# Altium PCB cs301_Team01_Artwork.PcbDoc (part 2 of 2)
Units mm, origin at the board's own origin, x right, y up, seen from the top; angles counter-clockwise.
Board outline 87.88 x 127 mm, 2 copper layers (Top Layer, Bottom Layer); 173 components, 113 nets, 459 pads, 113 vias.
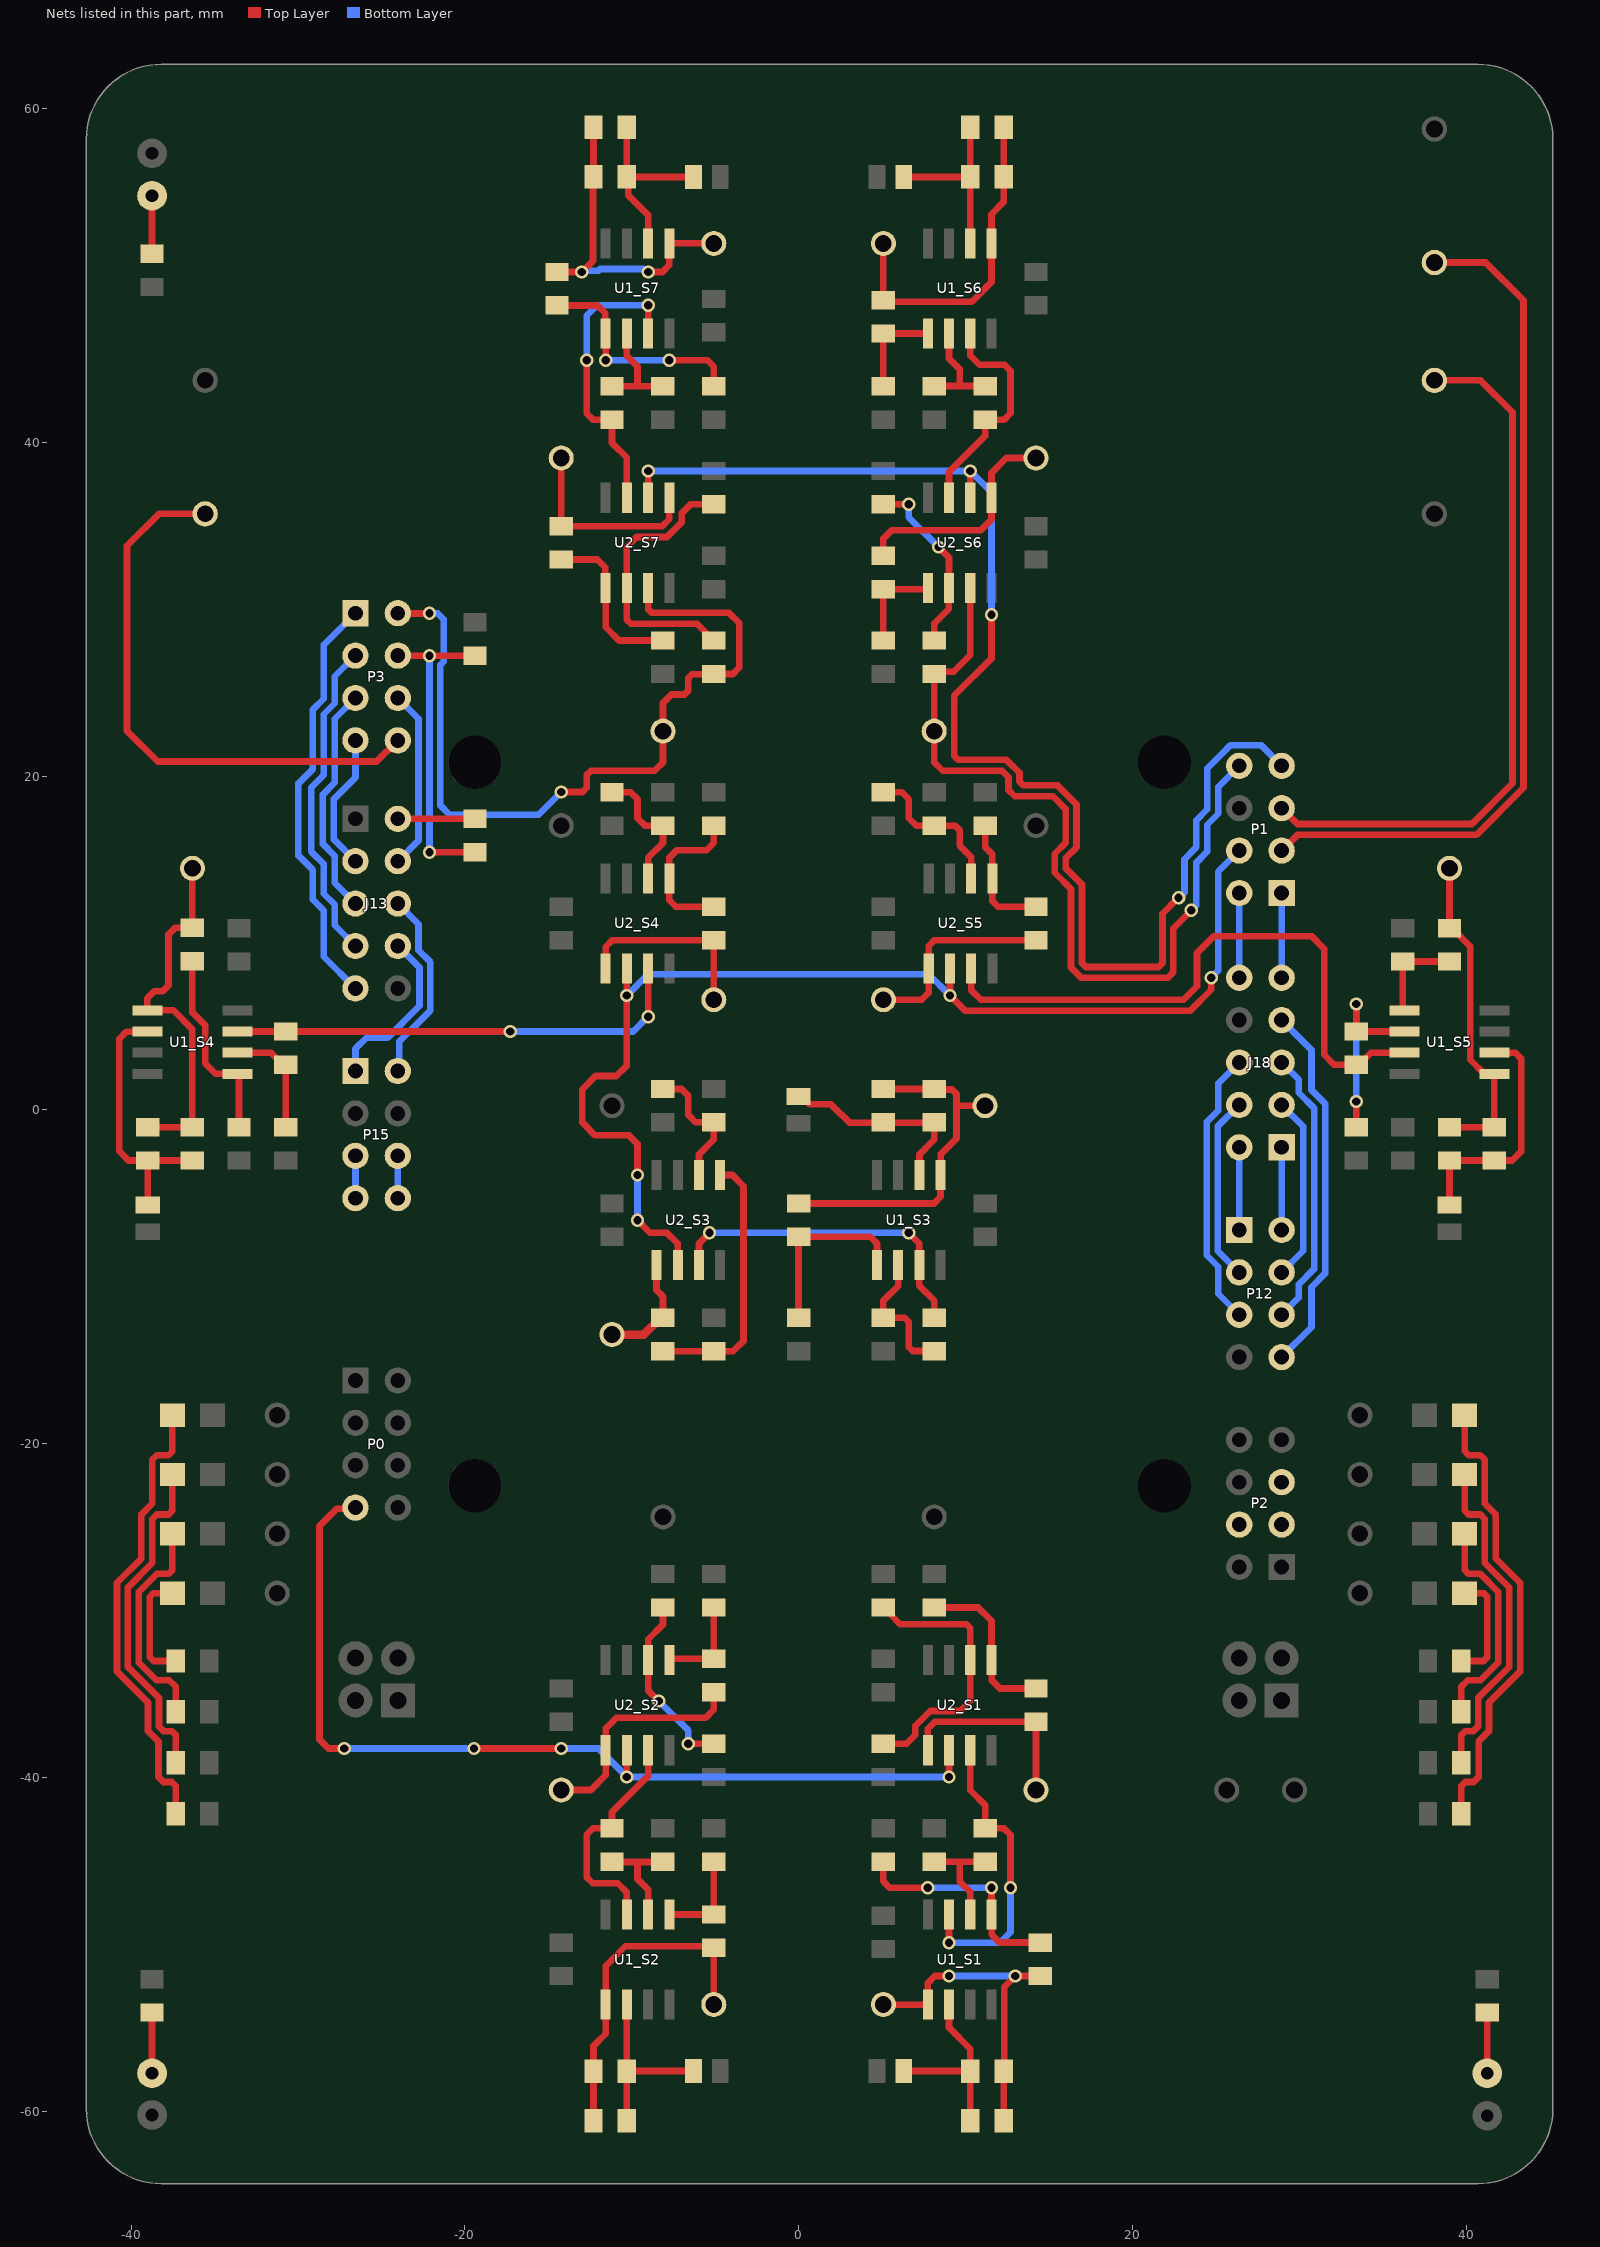
[diagram p2: the nets of this part, all layers, seen from the top]

## Via types
v1: diameter 0.8, hole 0.5, Top Layer to Bottom Layer, 111 vias
v2: diameter 1, hole 0.5, Top Layer to Bottom Layer, 2 vias

## Nets (pads, with @x,y where several pads share a name; then routed paths per layer and width w, separated by ;. In a path a pad name is that pad's centre, name@x,y a point inside that pad or via, vN(x,y) a via of type N, cw(c..) or ccw(c..) an arc to the next point about the centre after c; other vN are vias at no path point) (continued)
Is_White6: P1.8 R8_S6.1 U2_S6.7 Vo_S6.1 | length 52.1
  Top Layer w0.4: U2_S6.7@10.287,31.282 10.287,27.251 9.292,26.256 8.26,26.256 R8_S6.1@8.128,26.124 Vo_S6.1@8.128,22.696 8.128,20.828 8.636,20.32 12.192,20.32 12.581,19.931 12.581,19.169 12.954,18.796 15.24,18.796 16.002,18.034 16.002,16.002 15.348,15.348 15.348,14.215 16.325,13.238 16.325,8.529 16.943,7.912 22.118,7.912 22.46,8.254 22.46,10.886 v1(23.531,11.957)
  Bottom Layer w0.4: v1(23.531,11.957) 23.838,12.264 23.838,14.821 24.492,15.475 24.492,17.09 25.146,17.744 25.146,19.359 P1.8@26.406,20.619
Is_White7: P3.2 R8_S7.1 U2_S7.7 Vo_S7.1 | length 48.7
  Top Layer w0.4: P3.2@-24.013,29.763 -23.99,29.74 -22.14,29.74 -22.118,29.718 v1@-22.098,29.718 ; v1(-14.224,19.05) -12.954,19.05 -12.7,19.304 -12.7,20.066 -12.446,20.32 -8.636,20.32 -8.128,20.828 Vo_S7.1@-8.128,22.696 -8.128,24.384 -7.62,24.892 -6.838,24.892 -6.604,25.126 -6.604,25.878 -6.37,26.112 R8_S7.1@-5.092,26.112 ; U2_S7.7@-9.017,31.282 -9.017,30.016 -8.783,29.782 -4.161,29.782 -3.556,29.177 -3.556,26.506 -3.938,26.124 R8_S7.1@-5.08,26.124
  Bottom Layer w0.4: v1(-22.118,29.763) -21.635,29.763 -21.264,29.392 -21.264,26.869 -21.464,26.67 -21.464,18.232 -20.92,17.688 -15.586,17.688 v1(-14.224,19.05)
M1_D1: J13.3 P3.7 | length 8.7
  Bottom Layer w0.4: P3.7@-26.553,22.143 -26.553,19.929 -27.848,18.634 -27.848,16.199 J13.3@-26.553,14.904 -26.471,14.986 J13.3@-26.162,14.986
M1_D2: J13.9 P3.1 | length 25.3
  Bottom Layer w0.4: J13.9@-26.553,7.284 -28.448,9.179 -28.448,11.938 -29.102,12.592 -29.102,14.37 -29.972,15.24 -29.972,19.558 -29.102,20.428 -29.102,23.983 -28.448,24.637 -28.448,27.868 -26.922,29.394 P3.1@-26.553,29.763
M1_EN: J13.8 P15.1 | length 10.4
  Bottom Layer w0.4: P15.1@-26.553,2.331 -26.553,3.673 -25.908,4.318 -24.638,4.318 -22.718,6.238 -22.718,8.529 J13.8@-24.013,9.824
M1_IN1: J13.5 P3.5 | length 13.9
  Bottom Layer w0.4: J13.5@-26.553,12.364 -27.794,13.605 -27.794,15.22 -28.502,15.929 -28.502,18.904 -27.794,19.613 -27.794,23.442 P3.5@-26.553,24.683
M1_IN2: J13.4 P3.6 | length 10.8
  Bottom Layer w0.4: J13.4@-24.013,14.904 -22.772,16.145 -22.772,23.442 P3.6@-24.013,24.683
M1_INV: J13.7 P3.3 | length 19.6
  Bottom Layer w0.4: J13.7@-26.553,9.824 -27.794,11.065 -27.794,12.3 -28.448,12.954 -28.448,14.732 -29.21,15.494 -29.21,19.304 -28.448,20.066 -28.448,23.713 -27.794,24.366 -27.794,25.982 P3.3@-26.553,27.223
M1_QA: P15.5 P15.7 | length 2.5
  Bottom Layer w0.4: P15.7@-26.553,-5.289 P15.5@-26.553,-2.749
M1_QB: P15.6 P15.8 | length 2.5
  Bottom Layer w0.4: P15.8@-24.013,-5.289 P15.6@-24.013,-2.749
M1_SLW: J13.6 P15.2 | length 11.6
  Bottom Layer w0.4: P15.2@-24.013,2.331 -23.926,2.418 -23.926,4.105 -22.064,5.968 -22.064,8.856 -22.772,9.564 -22.772,11.123 J13.6@-24.013,12.364
M2_D1: J18.1 P12.2 | length 5
  Bottom Layer w0.4: P12.2@28.946,-7.194 J18.1@28.946,-2.241
M2_D2: J18.7 P12.8 | length 22.3
  Bottom Layer w0.4: P12.8@28.946,-14.814 30.734,-13.026 30.734,-10.626 31.549,-9.811 31.549,0.376 30.734,1.191 30.734,3.591 J18.7@28.946,5.379
M2_EN: J18.6 P12.5 | length 16.7
  Bottom Layer w0.4: P12.5@26.406,-12.274 25.146,-11.014 25.146,-9.399 24.457,-8.709 24.457,-0.726 25.146,-0.036 25.146,1.579 J18.6@26.406,2.839
M2_IN1: J18.3 P12.4 | length 11.1
  Bottom Layer w0.4: P12.4@28.946,-9.734 30.241,-8.439 30.241,-0.996 J18.3@28.946,0.299
M2_IN2: J18.2 P12.1 | length 5
  Bottom Layer w0.4: P12.1@26.406,-7.194 J18.2@26.406,-2.241
M2_INV: J18.5 P12.6 | length 16.7
  Bottom Layer w0.4: P12.6@28.946,-12.274 29.972,-11.248 29.972,-10.464 30.895,-9.54 30.895,0.105 29.972,1.029 29.972,1.813 J18.5@28.946,2.839
M2_QA: J18.9 P1.1 | length 5.1
  Bottom Layer w0.4: J18.9@28.946,7.919 P1.1@28.946,12.999
M2_QB: J18.10 P1.2 | length 5.1
  Bottom Layer w0.4: J18.10@26.406,7.919 P1.2@26.406,12.999
M2_SLW: J18.4 P12.3 | length 11.1
  Bottom Layer w0.4: P12.3@26.406,-9.734 25.111,-8.439 25.111,-0.996 J18.4@26.406,0.299
NetC1_S1_1: C1_S1.1 D4_S1.C R9_S1.1 U1_S1.2 | length 11.5
  Top Layer w0.4: D4_S1.C@6.3,-57.594 C1_S1.1@10.287,-57.594 ; U1_S1.2@9.017,-53.61 9.017,-54.991 10.287,-56.261 C1_S1.1@10.287,-57.594 ; R9_S1.1@10.287,-60.562 C1_S1.1@10.287,-57.594
NetC1_S2_1: C1_S2.1 D4_S2.C R9_S2.1 U1_S2.2 | length 10.7
  Top Layer w0.4: R9_S2.1@-10.287,-60.308 -10.287,-57.514 U1_S2.2@-10.287,-53.61 ; C1_S2.1@-10.287,-57.594 D4_S2.C@-6.3,-57.594
NetC1_S3_1: C1_S3.1 D4_S3.C R9_S3.1 U1_S3.2 | length 12.3
  Top Layer w0.4: D4_S3.C@0,0.8 0.225,0.8 0.692,0.333 1.953,0.333 3.048,-0.762 5.08,-0.762 R9_S3.1@8.128,-0.762 ; U1_S3.2@7.239,-3.904 7.245,-3.898 7.245,-2.661 8.128,-1.778 R9_S3.1@8.128,-0.762 ; R9_S3.1@8.128,-0.746 R9_S3.1@8.128,-0.762
NetC1_S4_1: C1_S4.1 D4_S4.C R9_S4.1 U1_S4.2 | length 15.9
  Top Layer w0.4: U1_S4.2@-39.022,4.699 -39.028,4.693 -40.265,4.693 -40.709,4.249 -40.709,-2.471 -40.148,-3.032 C1_S4.1@-39,-3.032 ; D4_S4.C@-39,-5.7 C1_S4.1@-39,-3.032 ; R9_S4.1@-36.322,-3.032 C1_S4.1@-39,-3.032
NetC1_S5_1: C1_S5.1 D4_S5.C R9_S5.1 U1_S5.2 | length 14.5
  Top Layer w0.4: D4_S5.C@39,-5.7 R9_S5.1@39,-3.032 C1_S5.1@41.678,-3.032 42.762,-3.032 43.295,-2.499 43.295,3.084 42.95,3.429 U1_S5.2@41.7,3.429
NetC1_S6_1: C1_S6.1 D4_S6.C R9_S6.1 U1_S6.2 | length 10.7
  Top Layer w0.4: D4_S6.C@6.3,55.906 C1_S6.1@10.287,55.906 ; U1_S6.2@10.287,51.922 10.287,55.826 R9_S6.1@10.287,58.62
NetC1_S7_1: C1_S7.1 D4_S7.C R9_S7.1 U1_S7.2 | length 11.5
  Top Layer w0.4: R9_S7.1@-10.287,58.874 C1_S7.1@-10.287,55.906 ; U1_S7.2@-9.017,51.922 -9.017,53.622 -10.211,54.815 -10.211,55.83 C1_S7.1@-10.287,55.906 ; D4_S7.C@-6.3,55.906 C1_S7.1@-10.287,55.906
NetC2_S1_2: C2_S1.2 R7_S1.1 U2_S1.5 | length 10.1
  Top Layer w0.4: C2_S1.2@8.128,-29.812 10.762,-29.812 11.557,-30.607 U2_S1.5@11.557,-32.86 ; U2_S1.5@11.557,-32.97 11.585,-32.998 11.585,-34.191 12.064,-34.67 R7_S1.1@14.224,-34.67
NetC2_S2_2: C2_S2.2 R7_S2.1 U2_S2.5 | length 5.8
  Top Layer w0.4: U2_S2.5@-7.747,-32.97 -7.747,-32.938 -7.701,-32.892 R7_S2.1@-5.08,-32.892 C2_S2.2@-5.08,-29.812
NetC2_S3_2: C2_S3.2 R7_S3.1 U2_S3.5 | length 16
  Top Layer w0.4: R7_S3.1@-8.128,-14.462 -3.92,-14.462 -3.302,-13.844 -3.302,-4.572 -3.97,-3.904 U2_S3.5@-4.699,-3.904
NetC2_S4_2: C2_S4.2 R7_S4.1 U2_S4.5 | length 9.4
  Top Layer w0.4: R7_S4.1@-5.08,12.176 -7.35,12.176 -7.747,12.573 U2_S4.5@-7.747,13.876 -7.741,13.882 -7.741,15.119 -7.309,15.551 -5.531,15.551 -5.08,16.002 C2_S4.2@-5.08,17.034
NetC2_S5_2: C2_S5.2 R7_S5.1 U2_S5.5 | length 7.5
  Top Layer w0.4: C2_S5.2@11.176,17.034 11.176,15.748 11.61,15.314 U2_S5.5@11.61,13.876 11.61,12.52 11.954,12.176 R7_S5.1@14.224,12.176
NetC2_S6_2: C2_S6.2 R7_S6.1 U2_S6.5 | length 5.8
  Top Layer w0.4: C2_S6.2@5.08,28.124 R7_S6.1@5.08,31.204 7.701,31.204 7.747,31.25 U2_S6.5@7.747,31.282
NetC2_S7_2: C2_S7.2 R7_S7.1 U2_S7.5 | length 10.1
  Top Layer w0.4: R7_S7.1@-14.224,32.982 -12.064,32.982 -11.585,32.503 -11.585,31.31 U2_S7.5@-11.557,31.282 ; U2_S7.5@-11.557,31.172 -11.557,28.919 -10.762,28.124 C2_S7.2@-8.128,28.124
NetD1_A: D1.A R1.1 | length 3.5
  Top Layer w0.4: R1.1@-38.74,51.308 D1.A@-38.74,54.776
NetD2_A: D2.A R2.1 | length 3.6
  Top Layer w0.4: D2.A@-38.74,-57.724 R2.1@-38.74,-54.086
NetD3_A: D3.A R3.1 | length 3.6
  Top Layer w0.4: D3.A@41.26,-57.724 R3.1@41.26,-54.086
NetD5_2: D5.2 R12.2 | length 27.4
  Top Layer w0.4: D5.2@-37.522,-18.288 -37.522,-20.456 -37.756,-20.69 -38.46,-20.69 -38.726,-20.956 -38.726,-23.587 -39.38,-24.241 -39.38,-26.872 -40.844,-28.336 -40.844,-33.65 -38.98,-35.514 -38.98,-37.227 -38.354,-37.853 -38.354,-39.976 -38.06,-40.27 -37.556,-40.27 -37.322,-40.504 R12.2@-37.322,-42.164
NetD6_2: D6.2 R13.2 | length 20.3
  Top Layer w0.4: D6.2@-37.522,-21.844 -37.522,-24.012 -37.756,-24.246 -38.46,-24.246 -38.726,-24.512 -38.726,-27.143 -40.19,-28.607 -40.19,-33.379 -38.326,-35.243 -38.326,-36.956 -38.06,-37.222 -37.556,-37.222 -37.322,-37.456 R13.2@-37.322,-39.116
NetD7_2: D7.2 R14.2 | length 13.3
  Top Layer w0.4: D7.2@-37.522,-25.4 -37.522,-27.568 -37.756,-27.802 -38.46,-27.802 -39.536,-28.878 -39.536,-33.108 -38.47,-34.174 -37.708,-34.174 -37.322,-34.56 R14.2@-37.322,-36.068
NetD8_2: D8.2 R15.2 | length 6.7
  Top Layer w0.4: D8.2@-37.522,-28.956 -38.647,-28.956 -38.882,-29.19 -38.882,-32.786 -38.647,-33.02 R15.2@-37.322,-33.02
NetD9_2: D9.2 R16.2 | length 27.4
  Top Layer w0.4: R16.2@39.715,-42.164 39.715,-40.504 39.949,-40.27 40.453,-40.27 40.747,-39.976 40.747,-37.853 41.373,-37.227 41.373,-35.514 43.237,-33.65 43.237,-28.336 41.773,-26.872 41.773,-24.241 41.119,-23.587 41.119,-20.956 40.853,-20.69 40.149,-20.69 39.915,-20.456 D9.2@39.915,-18.288
NetD10_2: D10.2 R17.2 | length 20.3
  Top Layer w0.4: R17.2@39.715,-39.116 39.715,-37.456 39.949,-37.222 40.453,-37.222 40.719,-36.956 40.719,-35.243 42.583,-33.379 42.583,-28.607 41.119,-27.143 41.119,-24.512 40.853,-24.246 40.149,-24.246 39.915,-24.012 D10.2@39.915,-21.844
NetD11_2: D11.2 R18.2 | length 13.3
  Top Layer w0.4: R18.2@39.715,-36.068 39.715,-34.56 40.101,-34.174 40.863,-34.174 41.929,-33.108 41.929,-28.878 40.853,-27.802 40.149,-27.802 39.915,-27.568 D11.2@39.915,-25.4
NetD12_2: D12.2 R19.2 | length 6.7
  Top Layer w0.4: R19.2@39.715,-33.02 41.04,-33.02 41.275,-32.786 41.275,-29.19 41.04,-28.956 D12.2@39.915,-28.956
NetR4_S1_1: R4_S1.1 R10_S1.2 U1_S1.6 | length 6.1
  Top Layer w0.4: R10_S1.2@8.128,-45.052 9.652,-45.052 ; U1_S1.6@10.287,-47.846 10.287,-46.863 9.652,-46.228 9.652,-45.052 ; R4_S1.1@11.176,-45.052 9.652,-45.052
NetR4_S2_1: R4_S2.1 R10_S2.2 U1_S2.6 | length 6.4
  Top Layer w0.4: R4_S2.1@-11.16,-45.068 -9.652,-45.068 ; U1_S2.6@-9.017,-48.21 -9.017,-46.719 -9.652,-46.084 -9.652,-45.068 ; R10_S2.2@-8.144,-45.068 -9.652,-45.068
NetR4_S3_1: R4_S3.1 R10_S3.2 U1_S3.6 | length 8.4
  Top Layer w0.4: U1_S3.6@5.969,-9.224 5.969,-10.541 5.08,-11.43 5.08,-12.446 5.096,-12.462 6.366,-12.462 6.604,-12.7 6.604,-14.21 6.838,-14.444 8.11,-14.444 R4_S3.1@8.128,-14.462
NetR4_S4_1: R4_S4.1 R10_S4.2 U1_S4.6 | length 6.9
  Top Layer w0.4: U1_S4.6@-33.622,3.429 -31.614,3.429 -30.884,2.699 R4_S4.1@-30.734,2.699 R10_S4.2@-30.734,-1.032
NetR4_S5_1: R4_S5.1 R10_S5.2 U1_S5.6 | length 12
  Top Layer w0.4: v1@33.274,0.508 33.274,0.4 33.412,0.262 R10_S5.2@33.412,-1.032 ; v1@33.528,6.35 33.528,6.242 33.412,6.126 R4_S5.1@33.412,4.699 U1_S5.6@36.3,4.699
  Bottom Layer w0.4: v1(33.412,0.508) v1(33.412,6.35)
NetR4_S6_1: R4_S6.1 R10_S6.2 U1_S6.6 | length 6.4
  Top Layer w0.4: R10_S6.2@8.144,43.38 9.652,43.38 ; U1_S6.6@9.017,46.522 9.017,45.031 9.652,44.396 9.652,43.38 ; R4_S6.1@11.16,43.38 9.652,43.38
NetR4_S7_1: R4_S7.1 R10_S7.2 U1_S7.6 | length 6.1
  Top Layer w0.4: R4_S7.1@-11.176,43.364 -9.652,43.364 ; U1_S7.6@-10.287,46.158 -10.287,45.175 -9.652,44.54 -9.652,43.364 ; R10_S7.2@-8.128,43.364 -9.652,43.364
NetR6_S1_1: R6_S1.1 R8_S1.2 U2_S1.6 | length 16.8
  Top Layer w0.4: R6_S1.1@5.08,-37.972 6.478,-37.972 6.993,-37.457 6.993,-36.913 7.89,-36.016 9.704,-36.016 10.287,-35.433 10.287,-32.86 10.287,-31.05 10.053,-30.816 6.084,-30.816 5.58,-30.312 5.58,-30.162 5.23,-29.812 R8_S1.2@5.08,-29.812
NetR6_S2_1: R6_S2.1 R8_S2.2 U2_S2.6 | length 11
  Top Layer w0.4: v1(-8.382,-35.416) -9.017,-34.781 U2_S2.6@-9.017,-32.97 -9.005,-32.958 -9.005,-31.721 -8.128,-30.844 R8_S2.2@-8.128,-29.812 ; v1(-6.604,-37.972) R6_S2.1@-5.08,-37.972
  Bottom Layer w0.4: v1(-8.382,-35.416) -6.604,-37.194 v1@-6.604,-37.956
NetR6_S3_1: R6_S3.1 R8_S3.2 U2_S3.6 | length 8.1
  Top Layer w0.4: R8_S3.2@-8.128,1.254 -7.018,1.254 -6.604,0.84 -6.604,-0.302 -6.16,-0.746 R6_S3.1@-5.08,-0.746 ; U2_S3.6@-5.969,-3.904 -5.963,-3.898 -5.963,-2.661 -5.08,-1.778 R6_S3.1@-5.08,-0.762
NetR6_S4_1: R6_S4.1 R8_S4.2 U2_S4.6 | length 8.1
  Top Layer w0.4: R8_S4.2@-11.176,19.034 -10.066,19.034 -9.652,18.62 -9.652,17.478 -9.208,17.034 R6_S4.1@-8.128,17.034 -8.128,16.002 -9.011,15.119 -9.011,13.882 U2_S4.6@-9.017,13.876
NetR6_S5_1: R6_S5.1 R8_S5.2 U2_S5.6 | length 9.4
  Top Layer w0.4: R8_S5.2@5.08,19.034 6.19,19.034 6.604,18.62 6.604,17.478 7.048,17.034 R6_S5.1@8.128,17.034 9.382,17.034 9.652,16.764 9.652,15.851 10.34,15.163 U2_S5.6@10.34,13.876
NetR6_S6_1: R6_S6.1 R8_S6.2 U2_S6.6 | length 11
  Top Layer w0.4: R6_S6.1@5.08,36.284 v1(6.604,36.284) ; R8_S6.2@8.128,28.124 8.128,29.156 9.005,30.033 9.005,31.27 U2_S6.6@9.017,31.282 9.017,33.093 v1(8.382,33.728)
  Bottom Layer w0.4: v1@6.604,36.268 6.604,35.506 v1(8.382,33.728)
NetR6_S7_1: R6_S7.1 R8_S7.2 U2_S7.6 | length 16.8
  Top Layer w0.4: R8_S7.2@-5.08,28.124 -5.23,28.124 -5.58,28.474 -5.58,28.624 -6.084,29.128 -10.053,29.128 -10.287,29.362 -10.287,31.172 -10.287,33.745 -9.704,34.328 -7.89,34.328 -6.993,35.225 -6.993,35.769 -6.478,36.284 R6_S7.1@-5.08,36.284
Rx_1: P2.3
Rx_2: P2.5
Tx_1: P2.4
V_Amp_S1: R4_S1.2 U1_S1.7 U2_S1.3 | length 18.1
  Top Layer w0.4: v1(9.017,-49.911) U1_S1.7@9.017,-48.354 ; U2_S1.3@10.287,-38.514 10.287,-40.767 11.176,-41.656 R4_S1.2@11.176,-43.052 12.318,-43.052 12.7,-43.434 v1(12.7,-46.606) v1@12.7,-46.736
  Bottom Layer w0.4: v1(9.017,-49.911) 12.065,-49.911 12.7,-49.276 v1(12.7,-46.606)
V_Amp_S2: R4_S2.2 U1_S2.7 U2_S2.3 | length 13.9
  Top Layer w0.4: U1_S2.7@-10.287,-48.21 -10.287,-46.89 -10.839,-46.338 -12.336,-46.338 -12.7,-45.974 -12.7,-43.434 -12.302,-43.036 -11.192,-43.036 R4_S2.2@-11.176,-43.052 -11.176,-42.076 -9.017,-39.917 U2_S2.3@-9.017,-38.37
V_Amp_S3: R4_S3.2 U1_S3.7 U2_S3.3 | length 20
  Top Layer w0.4: U2_S3.3@-5.894,-9.229 U2_S3.3@-5.969,-9.304 -5.969,-8.001 v1(-5.334,-7.366) ; v1(6.604,-7.366) 7.226,-7.988 7.226,-9.211 7.239,-9.224 U1_S3.7@7.239,-9.304 7.239,-10.541 8.128,-11.43 R4_S3.2@8.128,-12.462
  Bottom Layer w0.4: v1(-5.334,-7.366) v1(6.604,-7.366)
V_Amp_S4: R4_S4.2 U1_S4.7 U2_S4.3 | length 28
  Top Layer w0.4: U1_S4.7@-33.622,4.699 R4_S4.2@-30.734,4.699 v1(-17.272,4.699) ; v1@-9.144,5.588 v1@-9.017,5.715 ; v1(-9.017,5.588) v1@-9.017,5.715 ; U2_S4.3@-9.017,8.476 v1@-9.017,5.715
  Bottom Layer w0.4: v1(-17.272,4.699) -9.906,4.699 v1(-9.017,5.588)
V_Amp_S5: R4_S5.2 U1_S5.7 U2_S5.3 | length 37.4
  Top Layer w0.4: U2_S5.3@10.34,8.476 10.34,7.186 10.922,6.604 23.067,6.604 23.876,7.413 23.876,9.398 24.892,10.414 30.734,10.414 31.496,9.652 31.496,3.302 32.099,2.699 R4_S5.2@33.412,2.699 33.562,2.699 34.292,3.429 U1_S5.7@36.3,3.429
V_Amp_S6: R4_S6.2 U1_S6.7 U2_S6.3 | length 13.9
  Top Layer w0.4: U2_S6.3@9.017,36.682 9.017,38.222 11.176,40.381 R4_S6.2@11.176,41.364 11.192,41.348 12.302,41.348 12.7,41.746 12.7,44.286 12.336,44.65 10.839,44.65 10.287,45.202 U1_S6.7@10.287,46.522
V_Amp_S7: R4_S7.2 U1_S7.7 U2_S7.3 | length 18
  Top Layer w0.4: v1@-12.7,44.958 v1(-12.7,44.918) -12.7,41.746 -12.318,41.364 R4_S7.2@-11.176,41.364 -11.176,39.968 -10.287,39.079 U2_S7.3@-10.287,36.826 ; U1_S7.7@-9.017,46.666 v1(-9.017,48.223)
  Bottom Layer w0.4: v1(-12.7,44.918) -12.7,47.588 -12.065,48.223 v1(-9.017,48.223)
V_Bat: J13.2 R4.2 | length 4.6
  Top Layer w0.4: J13.2@-24.013,17.444 R4.2@-19.39,17.444
V_Battery: P3.4 R4.1 R5.2 | length 19.1
  Top Layer w0.4: P3.4@-24.013,27.223 v1(-22.118,27.223) R5.2@-19.39,27.223 ; v1(-22.118,15.444) R4.1@-19.39,15.444
  Bottom Layer w0.4: v1(-22.118,15.444) v1(-22.118,27.223)
V_Bias1: P0.7 U2_S1.2 U2_S2.2 | length 57.3
  Top Layer w0.4: v1(-27.221,-38.262) -28.166,-38.262 -28.71,-37.718 -28.71,-24.943 -27.657,-23.889 -26.611,-23.889 P0.7@-26.553,-23.831 ; v1(-19.448,-38.262) v1(-14.224,-38.262) ; v1(-10.287,-39.972) U2_S2.2@-10.287,-38.37 ; v1(9.017,-39.972) U2_S1.2@9.017,-38.37
  Bottom Layer w0.4: v1(-27.221,-38.262) v1(-19.448,-38.262) ; v1(-14.224,-38.262) -11.997,-38.262 v1(-10.287,-39.972) v1(9.017,-39.972)
V_Bias3: P1.4 U2_S3.2 U2_S4.2 U2_S5.2 | length 71.4
  Top Layer w0.4: U2_S4.2@-10.287,8.476 v1(-10.287,6.858) -10.287,2.667 -10.922,2.032 -12.162,2.032 -12.954,1.24 -12.954,-0.762 -12.192,-1.524 -10.16,-1.524 -9.652,-2.032 v1(-9.652,-3.904) v1@-9.652,-3.981 ; v1(-9.652,-6.604) -8.89,-7.366 -7.874,-7.366 -7.239,-8.001 U2_S3.2@-7.239,-9.304 ; U2_S5.2@9.07,8.476 v1(9.07,6.858) 9.978,5.95 23.476,5.95 24.73,7.204 v1@24.73,7.874
  Bottom Layer w0.4: v1(-10.287,6.858) -9.017,8.128 7.8,8.128 v1(9.07,6.858) ; v1(-9.652,-6.604) v1(-9.652,-3.904) ; v1(24.73,7.919) 24.73,7.937 25.146,8.353 25.146,14.279 P1.4@26.406,15.539
V_Bias6: P1.7 U2_S6.2 U2_S7.2 | length 83.5
  Top Layer w0.4: U2_S7.2@-9.017,36.682 v1(-9.017,38.284) ; U2_S6.2@10.287,36.682 v1(10.287,38.284) ; v1(11.557,29.679) 11.557,27.051 9.332,24.826 9.332,21.208 9.566,20.974 12.463,20.974 13.235,20.202 13.235,19.684 13.47,19.45 15.511,19.45 16.656,18.305 16.656,15.731 16.002,15.077 16.002,14.486 16.979,13.508 16.979,8.8 17.214,8.566 21.572,8.566 21.806,8.8 21.806,11.756 v1(22.77,12.72)
  Bottom Layer w0.4: v1(-9.017,38.284) v1(10.287,38.284) 11.557,37.014 v1(11.557,29.679) ; v1(22.77,12.72) 22.813,12.72 23.122,13.029 23.122,15.014 23.114,15.022 23.838,15.746 23.838,17.361 24.492,18.015 24.492,20.461 25.4,21.369 25.892,21.86 27.705,21.86 P1.7@28.946,20.619 ; v1@22.88,12.61 v1@22.88,12.718
V_Buzz_1: B1.1 P1.3 | length 51.5
  Top Layer w0.4: P1.3@28.946,15.539 29.89,16.483 40.613,16.483 43.434,19.304 43.434,48.514 41.172,50.776 B1.1@38.1,50.776
V_Buzz_2: B2.1 P3.8 | length 34.1
  Top Layer w0.4: B2.1@-35.56,35.714 -38.328,35.714 -40.24,33.802 -40.24,22.714 -38.398,20.872 -25.284,20.872 P3.8@-24.013,22.143
V_Buzz_3: B3.1 P1.5 | length 42.9
  Top Layer w0.4: P1.5@28.946,18.079 28.961,18.079 29.903,17.137 40.342,17.137 42.78,19.575 42.78,41.802 40.868,43.714 B3.1@38.1,43.714
V_Comp_S1: R7_S1.2 U2_S1.1 Vc_S1.1 | length 11.9
  Top Layer w0.4: U2_S1.1@7.747,-38.26 7.747,-37.084 8.161,-36.67 R7_S1.2@14.224,-36.67 Vc_S1.1@14.224,-40.75
V_Comp_S2: R7_S2.2 U2_S2.1 Vc_S2.1 | length 14.1
  Top Layer w0.4: Vc_S2.1@-14.478,-40.75 -12.446,-40.75 -11.557,-39.861 -11.557,-37.067 -10.921,-36.431 -5.587,-36.431 -5.08,-35.924 R7_S2.2@-5.08,-34.892
V_Comp_S3: R7_S3.2 U2_S3.1 Vc_S3.1 | length 7.3
  Top Layer w0.4: U2_S3.1@-8.509,-8.796 -8.509,-10.795 -8.128,-11.176 R7_S3.2@-8.128,-12.462
  Top Layer w0.508: Vc_S3.1@-11.176,-13.462 -9.278,-13.462 -8.278,-12.462 R7_S3.2@-8.128,-12.462
V_Comp_S4: R7_S4.2 U2_S4.1 Vc_S4.1 | length 11.5
  Top Layer w0.4: U2_S4.1@-11.557,8.476 -11.557,9.779 -11.16,10.176 R7_S4.2@-5.08,10.176 Vc_S4.1@-5.08,6.604
V_Comp_S5: R7_S5.2 U2_S5.1 Vc_S5.1 | length 12.3
  Top Layer w0.4: Vc_S5.1@5.08,6.604 7.366,6.604 7.8,7.038 7.8,9.832 8.144,10.176 R7_S5.2@14.224,10.176
V_Comp_S6: R7_S6.2 U2_S6.1 Vc_S6.1 | length 14.1
  Top Layer w0.4: R7_S6.2@5.08,33.204 5.08,34.236 5.587,34.743 10.921,34.743 11.557,35.379 11.557,38.173 12.446,39.062 Vc_S6.1@14.478,39.062
V_Comp_S7: R7_S7.2 U2_S7.1 Vc_S7.1 | length 11.9
  Top Layer w0.4: Vc_S7.1@-14.224,39.062 R7_S7.2@-14.224,34.982 -8.161,34.982 -7.747,35.396 U2_S7.1@-7.747,36.572
V_F_S1: C3_S1.2 R11_S1.2 U1_S1.5 | length 13.7
  Top Layer w0.4: R11_S1.2@5.08,-45.052 5.08,-46.228 5.458,-46.606 v1(7.747,-46.606) ; v1(11.557,-46.606) U1_S1.5@11.557,-48.21 11.585,-48.238 11.585,-49.431 12.048,-49.894 C3_S1.2@14.478,-49.894
  Bottom Layer w0.4: v1(7.747,-46.606) v1(11.557,-46.606)
V_F_S2: C3_S2.2 R11_S2.2 U1_S2.5 | length 5.5
  Top Layer w0.4: U1_S2.5@-7.747,-48.21 -5.158,-48.21 C3_S2.2@-5.08,-48.132 ; C3_S2.2@-5.08,-48.116 R11_S2.2@-5.08,-45.306
V_F_S3: C3_S3.2 R11_S3.2 U1_S3.5 | length 11
  Top Layer w0.4: R11_S3.2@0,-12.462 C3_S3.2@0,-7.588 ; C3_S3.2@0,-7.604 4.302,-7.604 4.699,-8.001 U1_S3.5@4.699,-9.304
V_F_S4: C3_S4.2 R11_S4.2 U1_S4.5 | length 11.7
  Top Layer w0.4: C3_S4.2@-36.322,8.906 -36.322,5.842 -35.56,5.08 -35.56,2.794 -34.925,2.159 U1_S4.5@-33.622,2.159 ; R11_S4.2@-33.528,-1.032 U1_S4.5@-33.528,2.065
V_F_S5: C3_S5.2 R11_S5.2 U1_S5.5 | length 5.8
  Top Layer w0.4: U1_S5.5@36.3,5.969 36.206,6.063 R11_S5.2@36.206,8.89 C3_S5.2@39,8.89
V_F_S6: C3_S6.2 R11_S6.2 U1_S6.5 | length 5.5
  Top Layer w0.4: R11_S6.2@5.08,43.618 C3_S6.2@5.08,46.428 ; C3_S6.2@5.08,46.444 5.158,46.522 U1_S6.5@7.747,46.522
V_F_S7: C3_S7.2 R11_S7.2 U1_S7.5 | length 13.7
  Top Layer w0.4: C3_S7.2@-14.478,48.206 -12.048,48.206 -11.585,47.743 -11.585,46.55 U1_S7.5@-11.557,46.522 v1(-11.557,44.918) ; v1(-7.747,44.918) -5.458,44.918 -5.08,44.54 R11_S7.2@-5.08,43.364
  Bottom Layer w0.4: v1(-11.557,44.918) v1(-7.747,44.918)
V_S_S1: C1_S1.2 C3_S1.1 R9_S1.2 U1_S1.1 Vs_S1.1 | length 19.8
  Top Layer w0.4: Vs_S1.1@5.08,-53.61 U1_S1.1@7.747,-53.61 7.747,-52.31 8.163,-51.894 v1(9.017,-51.894) ; R9_S1.2@12.287,-60.562 C1_S1.2@12.287,-57.594 12.321,-57.56 12.321,-52.566 v1(12.993,-51.894) C3_S1.1@14.478,-51.894
  Bottom Layer w0.4: v1(9.017,-51.894) v1(12.993,-51.894)
V_S_S2: C1_S2.2 C3_S2.1 R9_S2.2 U1_S2.1 Vs_S2.1 | length 19.8
  Top Layer w0.4: R9_S2.2@-12.287,-60.308 -12.287,-57.514 -12.287,-56.085 -11.557,-55.355 U1_S2.1@-11.557,-53.61 -11.557,-51.291 -10.382,-50.116 -5.096,-50.116 -5.08,-50.132 Vs_S2.1@-5.08,-53.61
V_S_S3: C1_S3.2 C3_S3.1 R9_S3.2 U1_S3.1 Vs_S3.1 | length 21.4
  Top Layer w0.4: C3_S3.1@0,-5.604 8.112,-5.604 8.509,-5.207 U1_S3.1@8.509,-3.904 8.515,-3.898 8.515,-2.661 9.462,-1.714 9.462,0.254 ; C1_S3.2@5.08,1.254 R9_S3.2@8.128,1.254 8.162,1.22 9.194,1.22 9.462,0.952 9.462,0.254 ; Vs_S3.1@11.176,0.254 9.462,0.254
V_S_S4: C1_S4.2 C3_S4.1 R9_S4.2 U1_S4.1 Vs_S4.1 | length 22.4
  Top Layer w0.4: C1_S4.2@-39,-1.032 R9_S4.2@-36.322,-1.032 -36.322,4.826 -37.465,5.969 U1_S4.1@-39.022,5.969 -39.022,6.698 -38.616,7.104 -38.108,7.104 -37.752,7.46 -37.752,10.508 -37.338,10.922 -36.338,10.922 C3_S4.1@-36.322,10.906 ; C3_S4.1@-36.472,10.906 C3_S4.1@-36.322,10.906 ; Vs_S4.1@-36.322,14.478 C3_S4.1@-36.322,10.906
V_S_S5: C1_S5.2 C3_S5.1 R9_S5.2 U1_S5.1 Vs_S5.1 | length 19.8
  Top Layer w0.4: R9_S5.2@39,-1.032 C1_S5.2@41.678,-1.032 41.678,2.137 U1_S5.1@41.7,2.159 41.1,2.159 40.25,3.009 40.25,9.79 39.15,10.89 C3_S5.1@39,10.89 Vs_S5.1@39,14.478
V_S_S6: C1_S6.2 C3_S6.1 R9_S6.2 U1_S6.1 Vs_S6.1 | length 19.8
  Top Layer w0.4: Vs_S6.1@5.08,51.922 5.08,48.444 5.096,48.428 10.382,48.428 11.557,49.603 U1_S6.1@11.557,51.922 11.557,53.667 12.287,54.397 12.287,55.826 R9_S6.2@12.287,58.62
V_S_S7: C1_S7.2 C3_S7.1 R9_S7.2 U1_S7.1 Vs_S7.1 | length 20
  Top Layer w0.4: C3_S7.1@-14.478,50.206 v1(-12.993,50.206) -12.321,50.878 -12.321,55.872 C1_S7.2@-12.287,55.906 R9_S7.2@-12.287,58.874 ; v1(-9.017,50.206) -8.163,50.206 -7.747,50.622 U1_S7.1@-7.747,51.922 Vs_S7.1@-5.08,51.922
  Bottom Layer w0.4: v1(-12.993,50.206) -12.916,50.283 -11.993,50.283 -11.892,50.384 -9.303,50.384 -9.125,50.206 v1(-9.017,50.206)
pads on no net: J13.1 J13.10 J18.8 P0.4 P2.6 P12.7

## Polygon pours and split planes (outlines as drawn)
GND on Top Layer "NONET_L-01_P-001" (solid, pour order 41): -3.81,-51.816 -3.302,-52.324 -3.302,-58.42 -3.81,-58.928 -8.89,-58.928 -9.652,-58.166 -9.652,-52.324 -9.144,-51.816
GND on Top Layer "NONET_L-01_P-001" (solid, pour order 42): 3.81,50.128 3.302,50.636 3.302,56.732 3.81,57.24 8.89,57.24 9.652,56.478 9.652,50.636 9.144,50.128
GND on Top Layer "GND_L-01_P-001" (solid, pour order 43): 3.556,-43.688 4.064,-44.196 12.192,-44.196 12.7,-43.688 12.7,-34.036 12.192,-33.528 4.318,-33.528 3.556,-34.29
GND on Top Layer "GND_L-01_P-001" (solid, pour order 44): -3.556,42 -4.064,42.508 -12.192,42.508 -12.7,42 -12.7,32.348 -12.192,31.84 -4.318,31.84 -3.556,32.602
GND on Top Layer "NONET_L-01_P-001" (solid, pour order 45): 38.207,-31.496 38.715,-32.004 38.715,-43.18 38.207,-43.688 34.651,-43.688 34.143,-43.18 34.143,-32.004 34.651,-31.496
GND on Top Layer "NONET_L-01_P-001" (solid, pour order 46): -35.814,-31.496 -36.322,-32.004 -36.322,-43.18 -35.814,-43.688 -32.258,-43.688 -31.75,-43.18 -31.75,-32.004 -32.258,-31.496
GND on Top Layer "NONET_L-01_P-001" (solid, pour order 47): -4.064,-44.196 -3.556,-43.688 -3.556,-37.084 -4.064,-36.576 -9.144,-36.576 -9.652,-37.084 -9.652,-43.688 -9.144,-44.196
GND on Top Layer "NONET_L-01_P-001" (solid, pour order 48): 4.064,42.508 3.556,42 3.556,35.396 4.064,34.888 9.144,34.888 9.652,35.396 9.652,42 9.144,42.508
GND on Top Layer "NONET_L-01_P-001" (solid, pour order 49): -6.096,-13.716 -6.604,-13.208 -6.604,-8.128 -6.096,-7.62 -4.064,-7.62 -3.556,-8.128 -3.556,-13.208 -4.064,-13.716
GND on Top Layer "NONET_L-01_P-001" (solid, pour order 50): -1.016,-13.208 -1.524,-13.716 -1.524,-15.24 -1.016,-15.748 6.096,-15.748 6.604,-15.24 6.604,-13.716 6.096,-13.208
GND on Top Layer "NONET_L-01_P-001" (solid, pour order 51): -6.604,2.032 -6.096,2.54 12.446,2.54 12.954,2.032 12.954,-6.35 12.446,-6.858 -2.286,-6.858 -6.604,-2.54
GND on Top Layer "NONET_L-01_P-001" (solid, pour order 52): -40.64,-2.286 -40.132,-1.778 -29.718,-1.778 -29.21,-2.286 -29.21,-5.334 -29.718,-5.842 -35.814,-5.842 -36.322,-6.35 -36.322,-7.874 -36.83,-8.382 -40.132,-8.382 -40.64,-7.874
GND on Top Layer "NONET_L-01_P-001" (solid, pour order 53): -40.64,4.064 -40.132,4.572 -36.576,4.572 -36.068,4.064 -36.068,0.508 -36.576,0 -40.132,0 -40.64,0.508
GND on Top Layer "NONET_L-01_P-001" (solid, pour order 54): 32.004,-5.08 32.512,-5.588 36.83,-5.588 37.338,-6.096 37.338,-8.128 37.846,-8.636 44.196,-8.636 44.958,-7.874 44.958,6.604 44.45,7.112 40.64,7.112 40.132,6.604 40.132,-1.27 39.548,-1.854 32.436,-1.854 32.004,-2.286
GND on Top Layer "NONET_L-01_P-001" (solid, pour order 55): 9.144,-52.578 9.652,-52.07 12.192,-52.07 12.7,-52.578 12.7,-55.626 12.192,-56.134 9.652,-56.134 9.144,-55.626
GND on Top Layer "NONET_L-01_P-001" (solid, pour order 56): -9.144,50.89 -9.652,50.382 -12.192,50.382 -12.7,50.89 -12.7,53.938 -12.192,54.446 -9.652,54.446 -9.144,53.938
5V on Top Layer "5V_L-01_P-001" (solid, pour order 57): -38.182,-64.344 cw(c-38.182,-59.844) -42.682,-59.844 -42.682,58.156 cw(c-38.182,58.156) -38.182,62.656 40.702,62.656 cw(c40.702,58.156) 45.202,58.156 45.202,-59.844 cw(c40.702,-59.844) 40.702,-64.344 -16.968,-64.344
5V on Bottom Layer "NONET_L-01_P-001" (solid, pour order 40): 18.123,12.954 18.631,13.462 20.155,13.462 20.663,12.954 20.663,2.032 20.155,1.524 18.631,1.524 18.123,2.032 18.123,12.446
GND on Bottom Layer "GND_L-01_P-001" (solid, pour order 58): -38.182,-64.344 cw(c-38.182,-59.844) -42.682,-59.844 -42.682,58.156 cw(c-38.182,58.156) -38.182,62.656 40.702,62.656 cw(c40.702,58.156) 45.202,58.156 45.202,-59.844 cw(c40.702,-59.844) 40.702,-64.344 -16.968,-64.344

## Keep-outs
Keep-Out Layer:
  the board outline again, w0.254

## Silkscreen, mask and mechanical layers (free items; w line width, h text height)
Top Overlay:
  text "0" at -29.035,29.263 h1
  text "1" at -21.162,29.263 h1
  text "2" at -29.035,26.723 h1
  text "3" at -21.328,26.723 h1
  text "4" at -29.035,24.183 h1
  text "5" at -22.177,24.183 h1
  text "6" at -29.035,21.643 h1
  text "7" at -22.177,21.643 h1
  text "7" at 23.81,20.119 h1
  text "6" at 30.851,20.119 h1
  text "Vb" at -22.177,18.468 h1
  text "5" at 23.81,17.579 h1
  text "4" at 30.851,17.579 h1
  text "Ib" at -29.868,16.944 h1
  text "3" at 23.81,15.039 h1
  text "2" at 30.851,15.039 h1
  text "D1" at -29.702,14.404 h1
  text "I2" at -22.177,13.134 h1
  text "1" at 24.143,12.499 h1
  text "0" at 30.851,12.499 h1
  text "I1" at -29.535,11.864 h1
  text "SLW" at -22.177,11.102 h1
  text "EN" at -22.177,9.07 h1
  text "~" at -29.035,8.824 h1
  text "ENCD" at 30.851,7.927 h1
  text "ENCD" at 20.303,7.419 h1
  text "D2" at -30.035,6.784 h1
  text "D2" at 30.851,5.895 h1
  text "EN" at 22.81,2.339 h1
  text "0" at -29.035,1.831 h1
  text "1" at -22.177,1.831 h1
  text "~" at 30.851,1.839 h1
  text "SLW" at 21.811,-0.201 h1
  text "I1" at 30.851,-0.201 h1
  text "2" at -29.035,-0.709 h1
  text "3" at -22.177,-0.709 h1
  text "I2" at 22.977,-2.741 h1
  text "D1" at 30.851,-2.741 h1
  text "4" at -29.035,-3.249 h1
  text "5" at -22.177,-3.249 h1
  text "ENCD" at -22.177,-5.789 h1
  text "ENCD" at -32.034,-6.551 h1
  text "0" at 23.81,-7.694 h1
  text "1" at 30.851,-7.694 h1
  text "2" at 23.81,-10.234 h1
  text "3" at 30.851,-10.234 h1
  text "4" at 23.81,-12.774 h1
  text "5" at 30.851,-12.774 h1
  text "6" at 23.81,-15.314 h1
  text "7" at 30.851,-15.314 h1
  text "DEBUG" at -40.002,-15.494 h1.52
  text "DEBUG" at 35.285,-15.494 h1.52
  text "0" at -29.035,-16.711 h1
  text "1" at -22.177,-16.711 h1
  text "2" at -29.035,-19.251 h1
  text "3" at -22.177,-19.251 h1
  text "7" at 23.81,-20.267 h1
  text "6" at 30.851,-20.267 h1
  text "4" at -29.035,-21.791 h1
  text "5" at -22.177,-21.791 h1
  text "5" at 23.81,-22.807 h1
  text "4" at 30.851,-22.807 h1
  text "6" at -29.035,-24.331 h1
  text "7" at -22.177,-24.331 h1
  text "3" at 23.81,-25.347 h1
  text "2" at 30.851,-25.347 h1
  text "1" at 24.143,-27.887 h1
  text "0" at 30.851,-27.887 h1
  text "-" at -29.035,-33.348 h1
  text "-" at -22.177,-33.348 h1
  text "-" at 23.81,-33.348 h1
  text "-" at 30.851,-33.348 h1
  text "+" at -29.035,-35.888 h1
  text "+" at -22.177,-35.888 h1
  text "+" at 23.797,-35.888 h1
  text "+" at 30.909,-35.888 h1

## Text inside footprints (layer, text, board x,y; h text height)
B1: Top Overlay "+" at 40.84,49.983 h1
B2: Top Overlay "+" at -32.82,34.921 h1
B3: Top Overlay "+" at 35.76,44.573 h1